# Altium PCB KitchenTimer1.PcbDoc
Units mm, origin at the board's own origin, x right, y up, seen from the top; angles counter-clockwise.
Board outline 100 x 100 mm, 2 copper layers (Top Layer, Bottom Layer); 46 components, 44 nets, 179 pads, 0 vias.
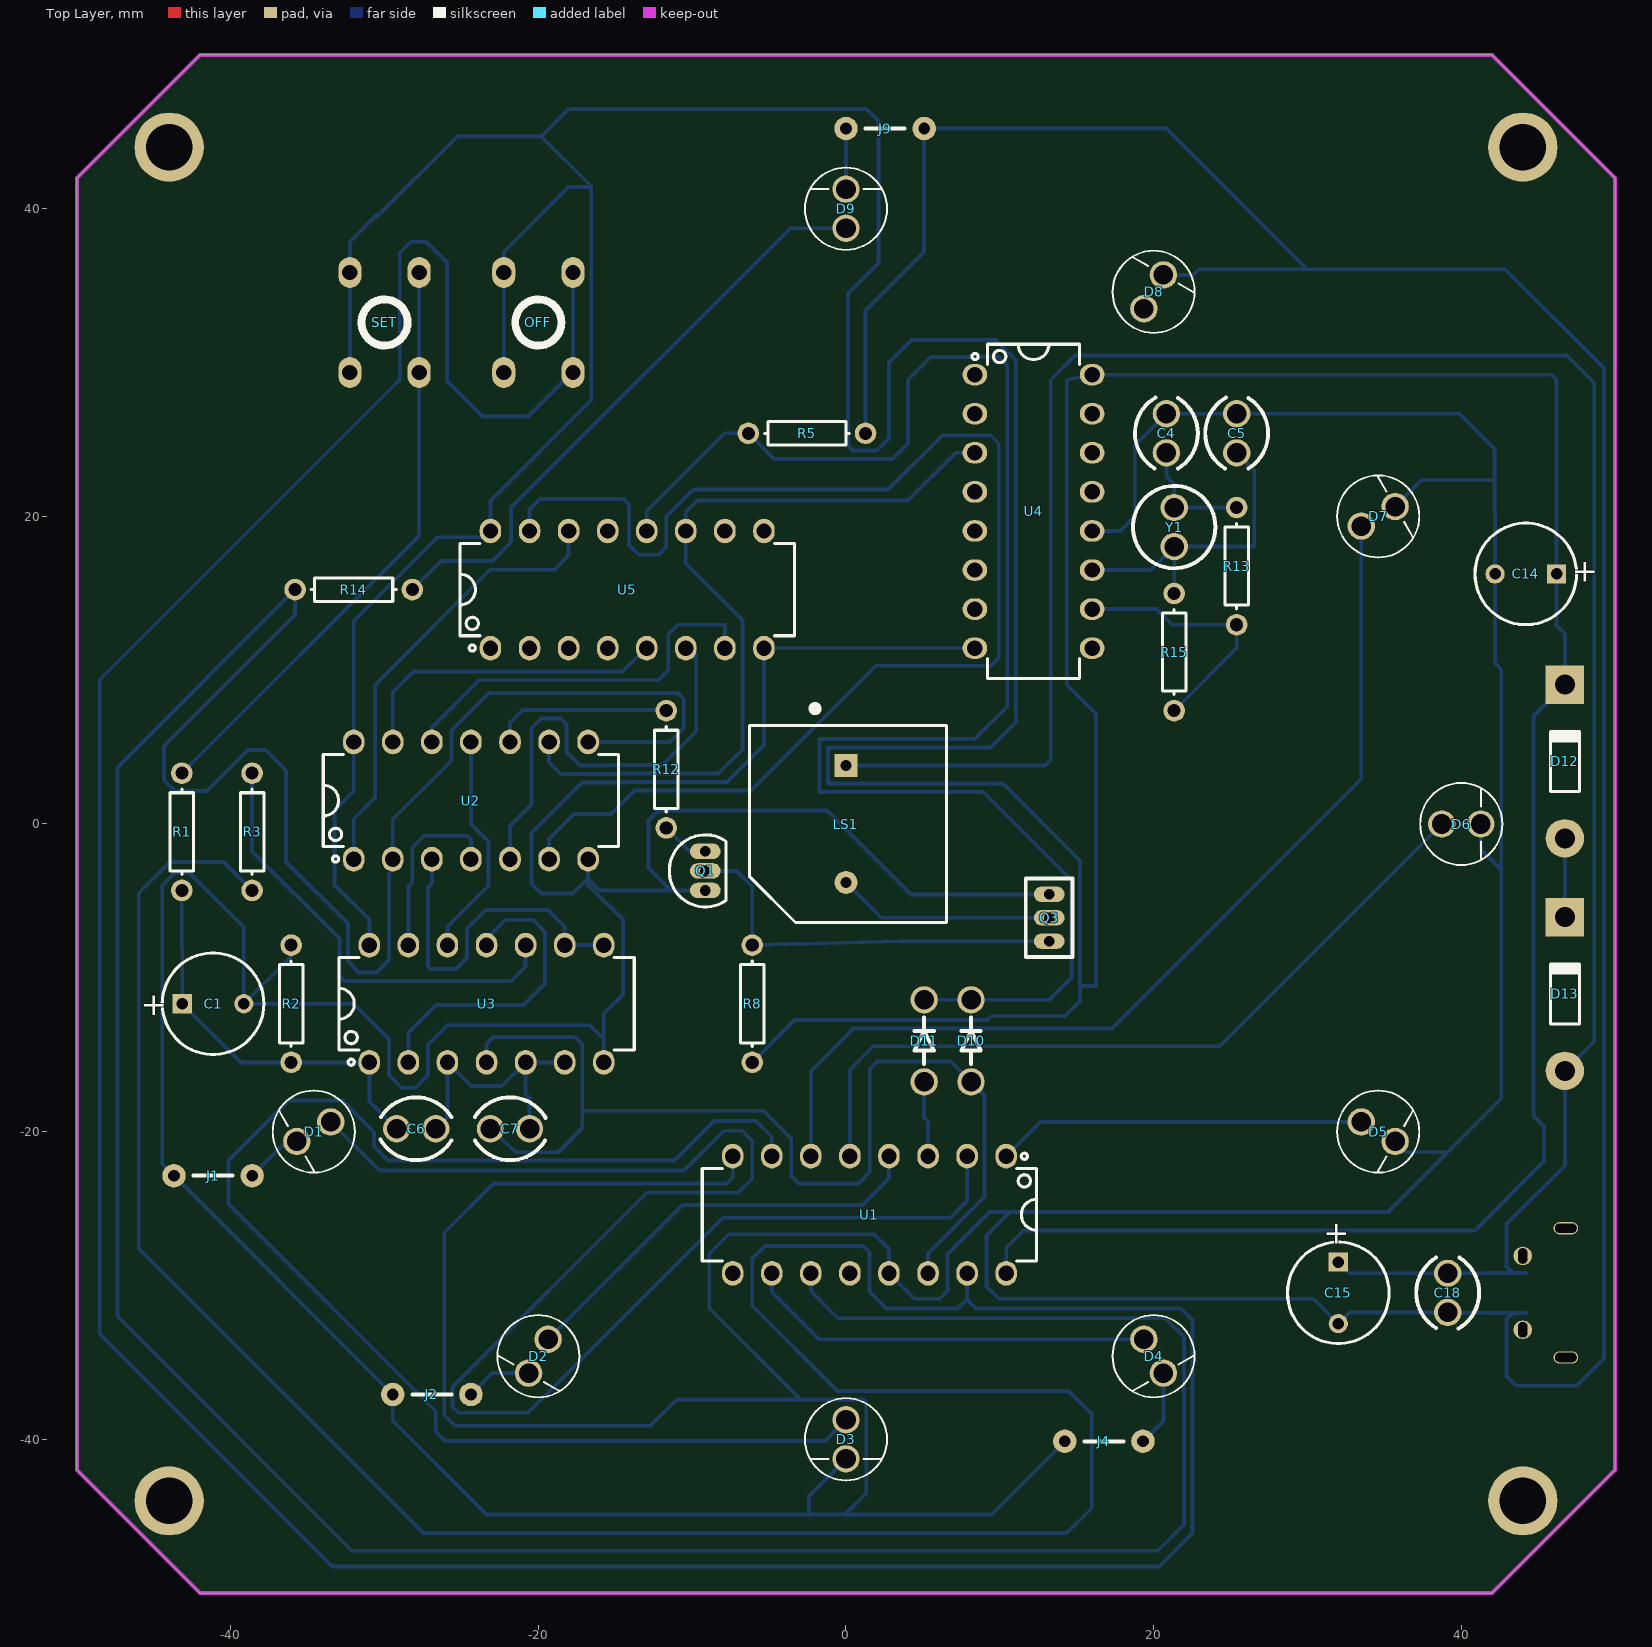
[diagram p0: Top Layer view]
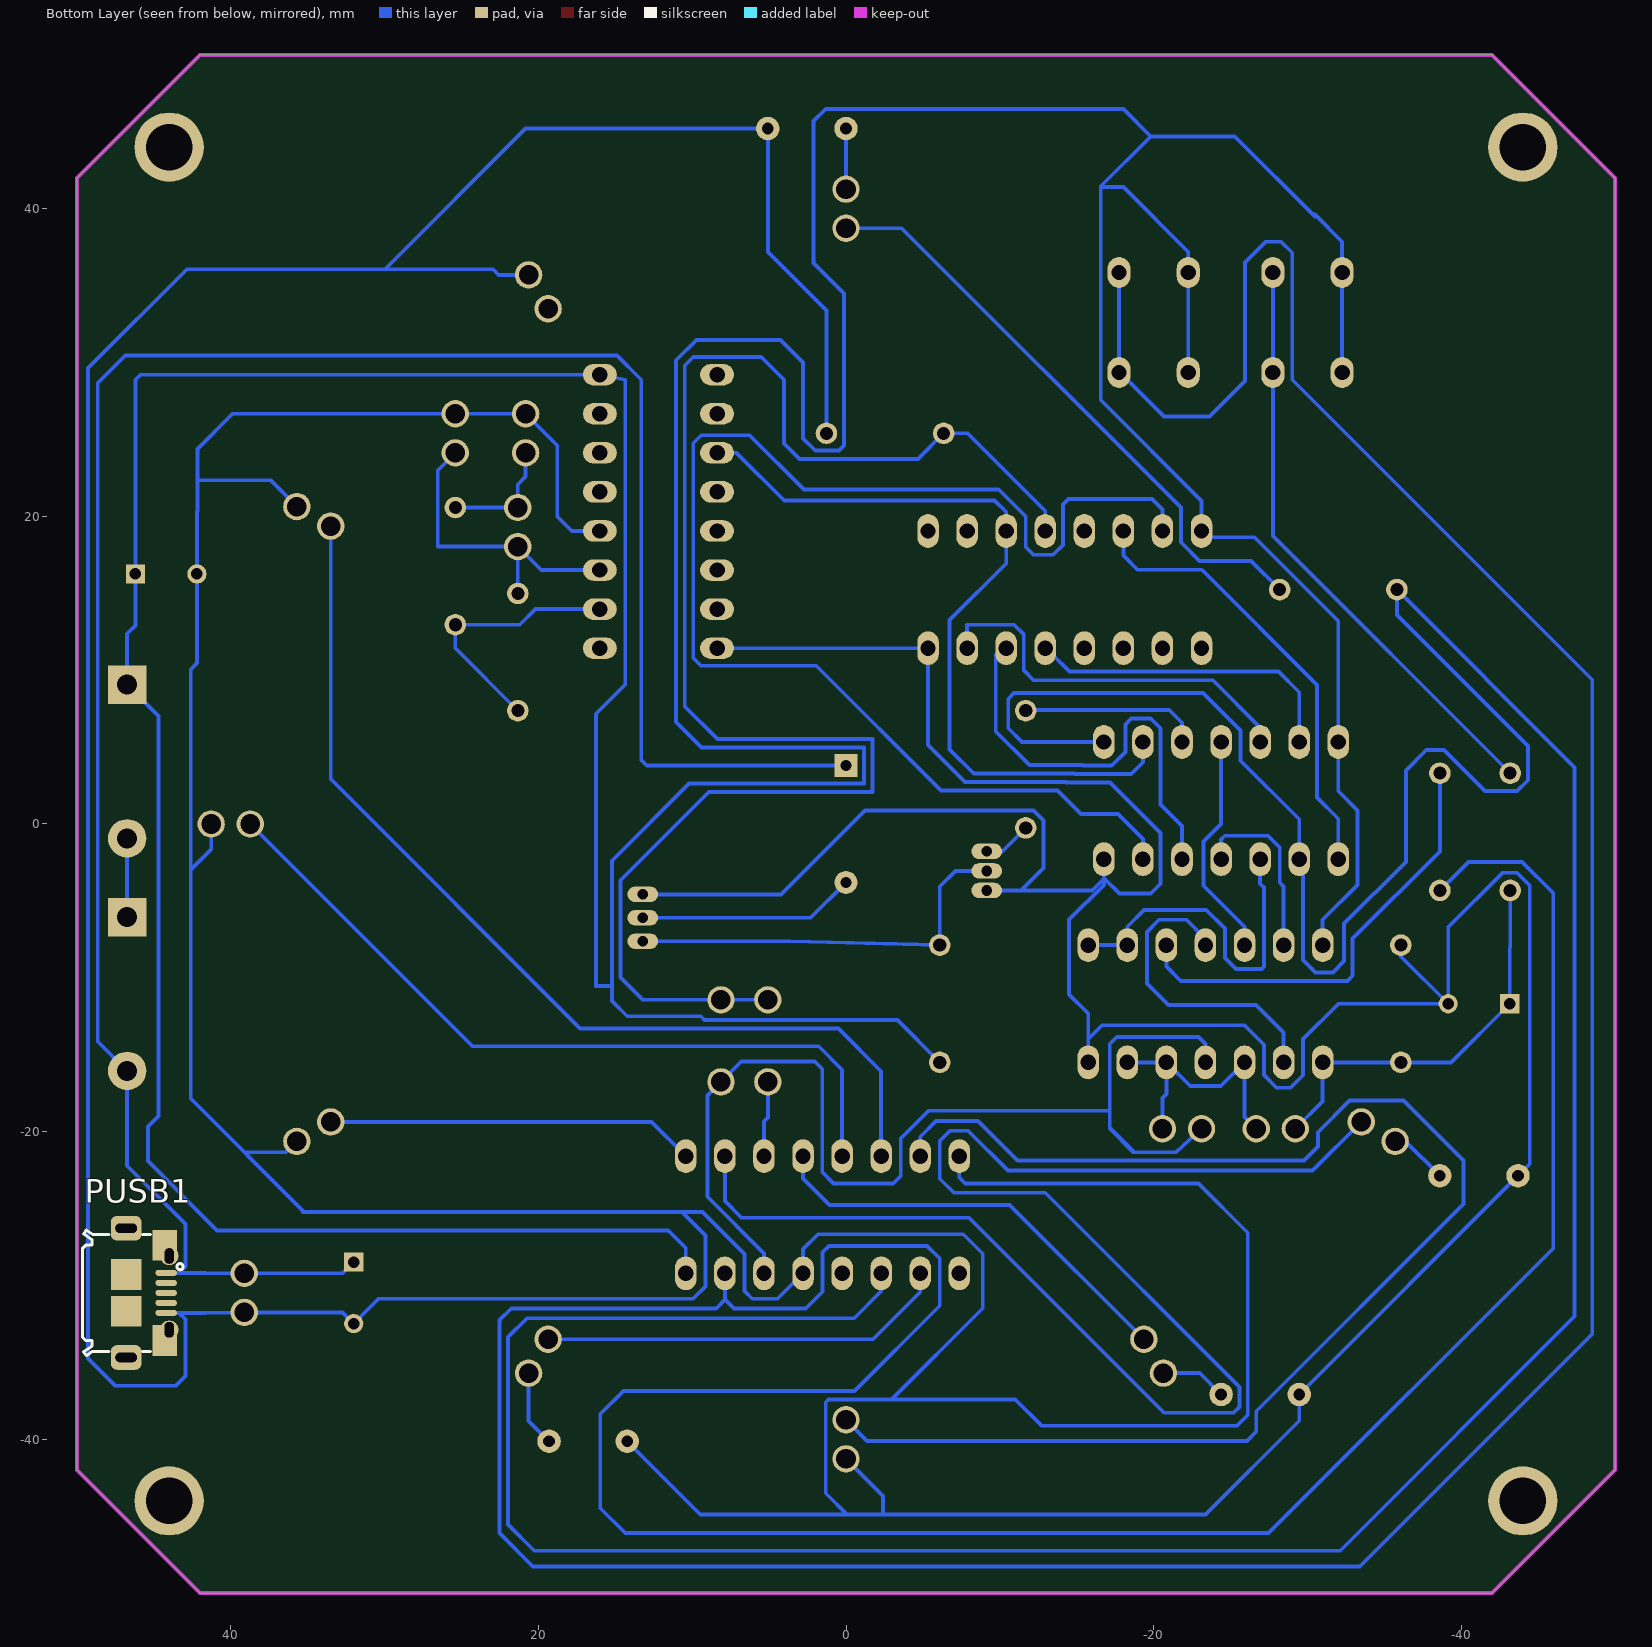
[diagram p1: Bottom Layer view, seen from below]

## Layer stack, top to bottom
Top Layer: signal copper 0.0356
Dielectric: dielectric 0.32, FR-4, Dk 4.8
Bottom Layer: signal copper 0.0356

## Board outline
-50,-42 -50,42 -42,50 42,50 50,42 50,-42 42,-50 -42,-50

## Design rules (kind name [scope] priority, off if disabled: settings)
Clearance [All] p1: gap=0.3
DiffPairsRouting [All] p1 off: maxlimit=0.254 minlimit=0.254 mostfreqgap=0.254 maxuncoupledlength=12.7
FanoutControl Fanout_BGA [IsBGA] p1 off: bgadir=Out bgaviamode=Centered fanoutstyle=Auto fanoutdirection=Alternating viagrid=0.025 // Fanout_BGA (Default Rule)
FanoutControl Fanout_LCC [IsLCC] p2 off: bgadir=Out bgaviamode=Centered fanoutstyle=Auto fanoutdirection=Alternating viagrid=0.025 // Fanout_LCC (Default Rule)
FanoutControl Fanout_SOIC [IsSOIC] p3 off: bgadir=Out bgaviamode=Centered fanoutstyle=Auto fanoutdirection=Alternating viagrid=0.025 // Fanout_SOIC (Default Rule)
FanoutControl Fanout_Small [(CompPinCount < 5)] p4 off: bgadir=Out bgaviamode=Centered fanoutstyle=Auto fanoutdirection=OutThenIn viagrid=0.025 // Fanout_Small (Default Rule)
FanoutControl Fanout_Default [All] p5 off: bgadir=Out bgaviamode=Centered fanoutstyle=Auto fanoutdirection=Alternating viagrid=0.025 // Fanout_Default (Default Rule)
MinimumSolderMaskSliver [All] p1: minsoldermaskwidth=0.001
PolygonConnect [All] p1: connectstyle=Relief reliefconductorwidth=0.254 reliefentries=4 polygonreliefangle="90 Angle"
RoomDefinition 5min_DIP [InComponentClass('5min_DIP')] p1: confinementstyle=ConfineIn formatcopy=TRUE lockcomponents=FALSE outline -283.975,-85.419 -233.175,-85.419 -233.175,-60.019 -283.975,-60.019
RoutingLayers [All] p1: top layer_v5=FALSE bottom layer_v5=TRUE
RoutingPriority [All] p1 off: routingpriority=0
RoutingTopology [All] p1 off: topology=Shortest
RoutingVias [All] p1 off: holewidth=0.711 width=1.27 viastyle="Through Hole" minholewidth=0.711 minwidth=1.27 maxholewidth=0.711 maxwidth=1.27
SilkToSilkClearance [All] p1: silktosilkclearance=0.001
SilkscreenOverComponentPads [IsPad] p1: minsilkscreentomaskgap=0.001
SolderMaskExpansion [All] p1 off: expansion=0.102
TestPointUsage [All] p1: valid=0 allowmultiple=FALSE
Testpoint [All] p1: side=3 testpointundercomponent=TRUE minsize=1.016 maxsize=2.54 preferedsize=1.524 minholesize=0 maxholesize=1.016 preferedholesize=0.813 testpointgrid=0.025 style=297 order=0123456789
Width [All] p1: maxlimit=0.25 minlimit=0.25 preferedwidth=0.25
12 further rules are at their usual default settings.

## Components (designator, comment, footprint, x,y, rotation, side; value= is the part's Value field where it differs from the comment)
C1 "Cap Pol1" A -41.148,-11.684 r0 top
C4 "Cap" CAP100N 20.828,25.4 r90 top
C5 "Cap" CAP100N 25.4,25.4 r90 top
C6 "Cap" CAP100N -27.94,-19.812 r180 top
C7 "Cap" CAP100N -21.844,-19.812 r0 top
C14 "Cap Pol1" A 44.196,16.256 r180 top
C15 "Cap Pol1" A 32.004,-30.48 r270 top
C18 "Cap" CAP100N 39.116,-30.48 r270 top
D1 "GRN" LED3MM -34.6,-20 r210 top locked
D2 "GRN" LED3MM -20,-34.6 r240 top locked
D3 "GRN" LED3MM 0,-40 r270 top locked
D4 "GRN" LED3MM 20,-34.6 r300 top locked
D5 "GRN" LED3MM 34.6,-20 r330 top locked
D6 "GRN" LED3MM 40,0 r0 top locked
D7 "GRN" LED3MM 34.6,20 r30 top locked
D8 "GRN" LED3MM 20,34.6 r60 top locked
D9 "RED" LED3MM 0,40 r90 top locked
D10 "1N4148" D_LN 8.128,-16.764 r90 top
D11 "1N4148" D_LN 5.08,-16.764 r90 top
D12 "1N4001" DO-35 46.736,4.064 r90 top
D13 "1N4001" DO-35 46.736,-11.049 r90 top
J1 "Jumper" JMP -41.148,-22.86 r0 top
J2 "Jumper" JMP -26.924,-37.084 r0 top
J4 "Jumper" JMP 16.764,-40.132 r0 top
J9 "Jumper" JMP 2.54,45.212 r180 top
LS1 "Buzzer" ABSM-1574 0,0 r270 top
OFF "SW-PB" BUTTN -20,32.604 r90 top
PUSB1 "CONN_USB_MICROB_BM" USB_MICRO_AB_BM_SHS 44.196,-30.48 r90 bottom
Q1 "C945" TO-92 -9.144,-3.048 r0 top
Q3 "BD139" BD139 13.208,-6.096 r0 top
R1 "Res1" AXIAL-0.3 -43.18,-0.508 r270 top
R2 "Res1" AXIAL-0.3 -36.068,-11.684 r90 top
R3 "Res1" AXIAL-0.3 -38.608,-0.508 r270 top
R5 "Res1" AXIAL-0.3 -2.54,25.4 r0 top
R8 "Res1" AXIAL-0.3 -6.096,-11.684 r270 top
R12 "Res1" AXIAL-0.3 -11.684,3.556 r270 top
R13 "Res1" AXIAL-0.3 25.4,16.764 r270 top
R14 "Res1" AXIAL-0.3 -32.004,15.24 r180 top
R15 "Res1" AXIAL-0.3 21.336,11.176 r270 top
SET "SW-PB" BUTTN -30,32.604 r270 top
U1 "HEF4017BT" DIP_16 1.524,-25.4 r270 top
U2 "HEF4011BT" DIP_14 -24.384,1.524 r90 top
U3 "HEF4001BT" DIP_14 -23.368,-11.684 r90 top
U4 "HEF4060BT" DIP_16 12.192,20.32 r0 top
U5 "HEF4060BT" DIP_16 -14.224,15.24 r90 top
Y1 "ECS-040-20-4X-DU" XTAL 21.336,19.304 r90 top

## Footprints (in the part's own frame and the unit in brackets; to place one, negate y for a bottom-side part, rotate by r counter-clockwise, add the part's x,y. Pads: shape width x height; smd on the part's side, far side on the other; paste and mask are expansions set on the pad)
A [mm] "Capacitor, Electrolytic, Radial; Body 4 x 5 mm (Dia.xH typ); Pin Spacing 1.5 mm (typ)"
  rect 1.25x1.25 hole 0.75: 1(-2,0)
  round 1.25 hole 0.75: 2(2,0)
  silkscreen extent -3.3,-3.3 3.3,3.3
ABSM-1574 [mm] "Magnetic Transducer Buzzer"
  rect 1.5x1.5 hole 0.7: 1(-3.8,0)
  round 1.5 hole 0.7: 2(3.8,0)
  silkscreen extent -7.73,-6.28 6.4,6.52
AXIAL-0.3 [mm] "Resistor; 2 Leads"
  round 1.4 hole 0.85: 1(-3.81,0) 2(3.81,0)
  silkscreen extent -2.77,-0.76 2.77,0.76
BD139 [mm]
  oval 2x1 hole 0.7: 1(0,0) 2(0,-1.524) 3(0,1.524)
  silkscreen extent -1.52,-2.54 1.52,2.54
BUTTN [mm]
  oval 2x1.5 hole 1: 1(-3.25,2.25) 1(3.25,2.25) 2(-3.25,-2.25) 2(3.25,-2.25)
  silkscreen extent -1.5,-1.5 1.5,1.5
CAP100N [mil]
  round 70 hole 50: 1(50,0) 2(-50,0)
  silkscreen extent -90,-80 91,80
D_LN [mil]
  round 70 hole 50: 1(0,0) 2(210,0)
  silkscreen extent 45,-25 165,25
DIP_14 [mm] "DIP, pitch 2.54mm, 300mil Width"
  oval 1.6x1.4 / inner round 1.4 / far side oval 2.2x1.4 hole 1: 1(-3.81,7.62) 2(-3.81,5.08) 3(-3.81,2.54) 4(-3.81,0) 5(-3.81,-2.54) 6(-3.81,-5.08) 7(-3.81,-7.62) 8(3.81,-7.62) 9(3.81,-5.08) 10(3.81,-2.54) 11(3.81,0) 12(3.81,2.54) 13(3.81,5.08) 14(3.81,7.62)
  silkscreen extent -4,-9.6 3,9.6, body extent -4,-9.53 4,9.52, height 3.81
DIP_16 [mm] "DIP, pitch 2.54mm, 300mil Width"
  oval 1.6x1.4 / inner round 1.4 / far side oval 2.2x1.4 hole 1: 1(-3.81,8.89) 2(-3.81,6.35) 3(-3.81,3.81) 4(-3.81,1.27) 5(-3.81,-1.27) 6(-3.81,-3.81) 7(-3.81,-6.35) 8(-3.81,-8.89) 9(3.81,-8.89) 10(3.81,-6.35) 11(3.81,-3.81) 12(3.81,-1.27) 13(3.81,1.27) 14(3.81,3.81) 15(3.81,6.35) 16(3.81,8.89)
  silkscreen extent -4,-10.87 3,10.87, body extent -3.93,-10 3.94,10, height 5.1
DO-35 [mm] "Diode, Axial; Body 3.8 x 1.9 mm (LxDia. max), Lead Dia. 0.53 mm (max)"
  round 2.5 hole 1.3: 1(-5,0)
  rect 2.5x2.5 hole 1.3: 2(5,0)
  silkscreen extent -1.95,-0.95 2.05,0.95
JMP [mil]
  round 60 hole 30: 1(-100,0) 2(100,0)
  silkscreen extent -50,0 50,0
LED3MM [mil] "Typical INFRARED GaAs LED; 2 Leads"
  round 70 hole 50: 1(-50,0) 2(50,0)
  silkscreen extent -105,-105 105,105
TO-92 [mm] "TO, Flat Index; 3 In-Line, Axial Leads; Body Dia. 4.6mm; Leads 0.41 x 0.39 mm (max)"
  oval 2x1 hole 0.7: 1(0,0) 2(0,1.27) 3(0,-1.27)
  silkscreen extent -2.34,-2.34 1.35,2.34
USB_MICRO_AB_BM_SHS [mm] "CONN, USB Micro AB - Standard (Bottom mount), Shell THD, TE 1981584-1"
  oval 0.4x1.4 smd: 1(1.3,0) 2(0.65,0) 3(0,0) 4(-0.65,0) 5(-1.3,0)
  round 1.2 hole 0.6 slot 1 at 0 deg: SH1(-2.4,-0.2) SH2(2.4,-0.2)
  rect 2x2 smd: SH3(-1.2,2.6) SH4(1.2,2.6)
  rrect50% 1.6x2 / inner oval 0.8x1.6 / far side oval 0.8x1.6 hole 0.6 slot 1.4 at 90 deg: SH5(-4.2,2.6) SH6(4.2,2.6)
  rect 2x1.6 smd: SH7(-3.1,0.1) SH8(3.1,0.1)
  silkscreen extent -4.08,-1.1 4.08,5.43, body extent -4.4,-0.2 4.4,5.4, height 2.78
XTAL [mil]
  round 70 hole 50: 1(50,0) 2(-50,0)
  silkscreen extent -105,-105 105,105

## Part data
C1 C14 C15: "Polarized Capacitor (Radial)"
C4 C5 C6 C7 C18: "Capacitor"
D1 D2 D3 D4 D5 D6 D7 D8 D9: library part LED0, "Typical INFRARED GaAs LED"
D10 D11 D12 D13: library part "Diode 1N4148", "High Conductance Fast Diode"
LS1: "Magnetic Transducer Buzzer"
OFF SET: "Switch"
PUSB1: library part CONN_USB_MICRO_AB_BM_SHS, "CONN, USB, MICRO AB, R/A, SMD, BOTTOM MOUNT"
Q1 Q3: library part NPN, "NPN Bipolar Transistor"
R1 R2 R3 R5 R8 R12 R13 R14 R15: "Resistor"
U1: library part CD4017_DIP16, "Counter, 10 decoded output"
U2: library part NANDx4_CD4011BCM, "GATE, NAND, Quad 2-Input"
U3: library part NORx4_CD74HC02_DIP, "Gate, NOR, Quad 2 Input"
U4 U5: library part CD4060_DIP16, "Counter, 14-Bit Binary, 3~18v, 10mA"
Y1: library part XTAL, "Crystal Oscillator"

## Free pads (board coordinates)
  round 4.5 hole 3: 0(-44,-44) 0(-44,44) 0(44,-44) 0(44,44)

## Nets (pads, with @x,y where several pads share a name; then routed paths per layer and width w, separated by ;. In a path a pad name is that pad's centre, name@x,y a point inside that pad or via, vN(x,y) a via of type N, cw(c..) or ccw(c..) an arc to the next point about the centre after c; other vN are vias at no path point)
5VDC: C15.1 C18.2 D13.1 LS1.1 PUSB1.1 | length 148.6
  Bottom Layer w0.25: LS1.1 12.951,3.8 13.307,4.156 13.307,28.881 14.881,30.456 46.86,30.456 48.641,28.675 48.641,-14.144 D13.1 46.736,-22.221 42.948,-26.008 42.948,-28.761 43.368,-29.18 ; C15.1 32.734,-29.21 C18.2 41.658,-29.18 43.368,-29.18 ; 43.368,-29.18 PUSB1.1 43.368,-29.18
GND: C1.2 C4.1 C5.1 C14.2 C15.2 C18.1 D3.2 D5.2 D6.2 D7.2 D8.2 J1.1 J2.1 J4.1 J9.1 PUSB1.5 Q1.3 Q3.3 R2.2 R5.2 U1.8 U1.13 U2.7 U3.7 U4.8 U4.12 U5.8 | length 718.4
  Bottom Layer w0.25: R2.2 -36.068,-8.604 C1.2 ; U1.8 -7.366,-22.983 -7.75,-23.367 -22.914,-23.367 -26.121,-26.574 -26.121,-38.429 -25.435,-39.115 -12.703,-39.115 -11.001,-37.413 -2.954,-37.413 ; -2.413,-44.831 -2.413,-43.683 D3.2 ; R5.2 1.27,33.377 5.08,37.187 J9.1 20.828,45.212 29.972,36.068 ; U4.8 U5.8 -5.334,5.135 -7.737,2.732 -14.278,2.732 -14.307,2.702 -17.173,2.702 -20.45,-0.574 -20.45,-3.885 -19.815,-4.52 -17.78,-4.52 -16.791,-3.532 ; Q3.3 4.215,-4.572 -1.228,0.871 -12.195,0.871 -12.83,0.236 -12.83,-2.869 -11.381,-4.318 ; J4.1 9.475,-44.881 -0.054,-44.881 ; U4.12 17.827,19.05 18.768,19.991 18.768,24.61 C4.1 C5.1 39.878,26.67 42.164,24.384 42.164,20.328 42.196,20.296 C14.2 42.196,10.456 42.593,10.06 42.593,-17.859 35.231,-25.221 10.665,-25.221 ; D8.2 22.578,35.7 22.946,36.068 29.972,36.068 ; 35.306,-25.221 10.665,-25.221 ; D5.2 36.401,-21.336 39.116,-21.336 ; D7.2 37.417,22.352 42.164,22.352 ; D6.2 41.27,-1.646 42.545,-2.921 ; PUSB1.5 43.368,-31.78 ; C1.2 -32.006,-11.684 -29.718,-13.972 -29.718,-16.334 -28.907,-17.145 -27.995,-17.145 -27.178,-16.328 -27.178,-14.347 -25.912,-13.081 -16.639,-13.081 -15.748,-13.972 ; C1.2 -39.148,-6.701 -42.675,-3.174 -43.64,-3.174 -44.453,-3.987 -44.453,-22.095 J1.1 J2.1 -29.464,-38.795 -23.378,-44.881 -8.459,-44.881 ; -16.791,-3.532 -16.764,-3.504 ; -16.791,-3.532 U2.7 ; -16.791,-3.532 -16.764,-3.559 ; -16.764,-3.559 -16.005,-4.318 -11.381,-4.318 ; -16.764,-3.559 -16.764,-3.504 ; -16.764,-3.559 -16.764,-3.961 -14.506,-6.219 -14.506,-11.073 -15.748,-12.315 -15.748,-13.972 ; -16.764,-3.504 U2.7 ; -16.764,-3.504 U2.7 ; -15.748,-13.972 U3.7 -15.748,-13.972 ; -11.381,-4.318 Q1.3 -11.381,-4.318 ; -8.459,-44.881 -6.875,-44.881 ; -8.459,-44.881 -6.875,-44.881 ; -6.875,-44.881 -0.054,-44.881 ; -6.875,-44.881 -0.054,-44.881 ; -2.954,-37.413 -8.89,-31.477 -8.89,-27.94 -7.62,-26.67 1.83,-26.67 2.794,-27.634 U1.13 4.445,-30.861 6.094,-30.861 6.601,-30.354 6.601,-27.943 9.323,-25.221 10.665,-25.221 ; -2.954,-37.413 1.14,-37.413 ; -2.954,-37.413 1.14,-37.413 ; -0.054,-44.881 1.318,-43.509 1.318,-37.591 1.14,-37.413 ; 10.665,-25.221 9.144,-26.742 9.144,-30.059 9.946,-30.861 30.385,-30.861 C15.2 32.734,-31.75 C18.1 41.658,-31.78 43.368,-31.78 ; 29.972,36.068 42.848,36.068 49.276,29.64 49.276,-34.743 47.495,-36.524 43.583,-36.524 42.948,-35.889 42.948,-32.199 43.368,-31.78
NetC1_1: C1.1 C6.1 R1.2 R2.1 U3.1 | length 26.2
  Bottom Layer w0.25: R1.2 -43.18,-7.993 -43.148,-8.025 C1.1 -39.338,-15.494 R2.1 U3.1 -30.988,-18.034 C6.1
NetC4_2: C4.2 R13.1 Y1.1 | length 7.8
  Bottom Layer w0.25: C4.2 20.828,22.582 21.336,22.074 Y1.1 R13.1
NetC5_2: C5.2 R15.1 U4.11 Y1.2 | length 20.8
  Bottom Layer w0.25: U4.11 19.812,16.51 Y1.2 ; R15.1 21.336,16.486 Y1.2 ; C5.2 26.54,22.99 26.54,18.035 26.539,18.034 Y1.2
NetC6_2: C6.2 C7.1 U3.3 U3.5 U3.6 | length 18
  Bottom Layer w0.25: C6.2 -25.908,-19.05 U3.3 -24.36,-17.042 -22.376,-17.042 U3.5 ; C7.1 -20.574,-17.804 -20.828,-17.55 U3.5 ; U3.6 U3.5
NetC7_2: C7.2 D10.1 U1.14 U3.4 | length 77.3
  Bottom Layer w0.25: U3.4 -23.368,-14.299 -22.912,-13.843 -17.604,-13.843 -17.148,-14.299 -17.148,-18.642 ; C7.2 -21.463,-21.336 ; U1.14 5.334,-27.91 9.014,-24.23 9.014,-17.65 D10.1 6.806,-15.442 2.029,-15.442 1.546,-15.925 1.546,-22.63 0.809,-23.368 -3.075,-23.368 -3.556,-22.887 -3.556,-20.447 -5.361,-18.642 -17.148,-18.642 ; -21.463,-21.336 -18.749,-21.336 -17.148,-19.735 -17.148,-18.642 ; -21.463,-21.336 -18.669,-21.336 -17.148,-19.815 -17.148,-18.642
NetD1_1: D1.1 U1.2 | length 101.1
  Bottom Layer w0.25: D1.1 -30.337,-22.529 -10.531,-22.529 -7.941,-19.939 -6.758,-19.939 -6.096,-20.601 -6.096,-23.059 -7.013,-23.976 -12.957,-23.976 -25.571,-36.59 -25.571,-37.893 -25.187,-38.277 -20.679,-38.277 -8.004,-25.602 6.782,-25.602 7.874,-24.51 U1.2
NetD1_2: D1.2 J1.2 | length 3.8
  Bottom Layer w0.25: J1.2 -36.383,-20.635 D1.2
NetD2_1: D2.1 U1.4 | length 27.9
  Bottom Layer w0.25: D2.1 -10.629,-24.764 1.067,-24.764 2.794,-23.037 U1.4
NetD2_2: D2.2 J2.2 | length 4.3
  Bottom Layer w0.25: J2.2 -23,-35.7 D2.2
NetD3_1: D3.1 U1.7 | length 92.5
  Bottom Layer w0.25: U1.7 -4.826,-20.331 -5.853,-19.304 -8.579,-19.304 -11.161,-21.886 -29.773,-21.886 -30.682,-20.977 -30.682,-20.044 -32.744,-17.982 -36.249,-17.982 -40.135,-21.868 -40.135,-24.713 -26.671,-38.177 -26.671,-39.502 -26.068,-40.105 -1.375,-40.105 D3.1
NetD4_1: D4.1 U1.10 | length 26.7
  Bottom Layer w0.25: U1.10 -4.826,-30.431 -1.757,-33.5 D4.1
NetD4_2: D4.2 J4.2 | length 5
  Bottom Layer w0.25: J4.2 20.635,-38.801 D4.2
NetD5_1: D5.1 U1.1 | length 24
  Bottom Layer w0.25: U1.1 12.639,-19.365 D5.1
NetD6_1: D6.1 U1.5 | length 50.7
  Bottom Layer w0.25: U1.5 0.254,-15.972 1.775,-14.451 24.279,-14.451 D6.1
NetD7_1: D7.1 U1.6 | length 65.6
  Bottom Layer w0.25: U1.6 -2.286,-16.074 0.494,-13.294 17.283,-13.294 33.5,2.923 D7.1
NetD9_1: D9.1 R14.1 | length 39.2
  Bottom Layer w0.25: R14.1 -26.339,17.095 -22.99,17.095 -21.771,18.315 -21.771,20.575 -3.616,38.73 D9.1
NetD9_2: D9.2 J9.2 | length 3.9
  Bottom Layer w0.25: D9.2 J9.2
NetD10_2: D10.2 D11.2 R5.1 U5.12 | length 106.9
  Bottom Layer w0.25: U5.12 -12.954,20.35 -7.904,25.4 R5.1 -4.675,23.725 3.02,23.725 4.036,24.741 4.036,28.881 5.509,30.354 9.928,30.354 10.487,29.795 10.487,7.647 8.366,5.525 -1.725,5.525 -1.725,2.075 8.921,2.075 14.653,-3.656 14.653,-9.982 13.205,-11.43 D10.2 D11.2
NetD11_1: D11.1 U1.3 | length 4.9
  Bottom Layer w0.25: D11.1 5.08,-19.074 5.334,-19.328 U1.3
NetD12_1: D12.1 D13.2 | length 5.1
  Bottom Layer w0.25: D13.2 46.736,-3.504 D12.1
NetLS1_2: LS1.2 Q3.1 | length 14.2
  Bottom Layer w0.25: LS1.2 2.296,-6.096 Q3.1
NetOFF_2: OFF.2 R3.2 U1.15 | length 373.3
  Bottom Layer w0.25: R3.2 -40.463,-2.463 -43.945,-2.463 -45.974,-4.492 -45.974,-27.586 -27.459,-46.101 14.355,-46.101 15.974,-44.482 15.974,-38.353 14.475,-36.854 -0.562,-36.854 -6.096,-31.32 -6.096,-28.253 -5.275,-27.432 1.116,-27.432 1.524,-27.84 1.524,-30.406 2.614,-31.496 7.286,-31.496 7.874,-30.908 ; OFF.2@-17.75,29.354 OFF.2@-17.75,29.422 ; -17.75,32.589 -17.75,35.854 OFF.2@-17.75,29.422 ; U1.15 7.874,-30.908 ; OFF.2@-17.75,29.422 -20.679,26.493 -23.625,26.493 -25.936,28.805 -25.936,36.501 -27.283,37.847 -28.299,37.847 -29.01,37.136 -29.01,28.881 -48.514,9.377 -48.514,-33.149 -33.403,-48.26 20.367,-48.26 22.527,-46.1 22.527,-32.257 21.765,-31.495 8.433,-31.495 7.874,-30.908
NetPUSB1_SH1: PUSB1.SH1 PUSB1.SH7
NetPUSB1_SH2: PUSB1.SH2 PUSB1.SH8
NetQ1_1: Q1.1 Q3.2 R8.1 | length 26.6
  Bottom Layer w0.25: Q1.1 -7.115,-3.048 -6.096,-4.067 R8.1 3.68,-7.62 Q3.2
NetQ1_2: Q1.2 R12.2 | length 3.2
  Bottom Layer w0.25: R12.2 -10.16,-1.778 Q1.2
NetR1_1: R1.1 SET.1 | length 38.9
  Bottom Layer w0.25: R1.1 -27.75,18.732 -27.75,29.354 SET.1@-27.75,35.854
NetR3_1: R3.1 U3.10 | length 29.5
  Bottom Layer w0.25: R3.1 -38.608,-1.778 -32.935,-7.451 -32.935,-9.866 -32.599,-10.202 -21.766,-10.202 -20.828,-9.264 U3.10
NetR12_1: R12.1 U2.10 | length 11.8
  Bottom Layer w0.25: U2.10 -21.844,6.586 -21.012,7.418 -11.736,7.418 R12.1
NetR13_2: R13.2 R15.2 U4.10 | length 17.1
  Bottom Layer w0.25: U4.10 20.19,13.97 21.206,12.954 R13.2 25.4,11.43 R15.2
NetR14_2: R14.2 U1.11 U2.2 U2.8 | length 251.8
  Bottom Layer w0.25: U2.8 -11.433,5.335 -10.544,6.224 -10.544,8.129 -10.925,8.51 -23.219,8.51 -25.657,6.072 -25.657,4.116 -29.464,0.309 U2.2 -29.464,-2.971 -29.718,-3.225 -29.718,-8.848 -30.522,-9.652 -31.65,-9.652 -32.385,-8.917 -32.385,-6.477 -36.401,-2.461 -36.401,3.481 -37.722,4.802 -38.865,4.802 -41.532,2.135 -43.615,2.135 -44.326,2.846 -44.326,5.081 -35.814,13.593 R14.2 -47.371,3.683 -47.371,-32.001 -32.128,-47.244 20.265,-47.244 21.968,-45.541 21.968,-33.349 20.75,-32.131 -0.535,-32.131 -2.286,-30.38 U1.11
NetU2_1: U2.1 U5.14 | length 29.6
  Bottom Layer w0.25: U2.1 -32.004,0.337 -30.61,1.731 -30.61,9.048 -23.132,16.526 -18.959,16.526 -18.034,17.451 U5.14
NetU2_3: U2.3 U3.8 U3.9 | length 22.9
  Bottom Layer w0.25: U2.3 -26.924,-3.885 -27.178,-4.139 -27.178,-9.273 -27.029,-9.422 -25.352,-9.422 -24.638,-8.708 -24.638,-6.803 -23.423,-5.588 -19.379,-5.588 -18.288,-6.679 U3.9 U3.8
NetU2_4: U2.4 U3.13 | length 12
  Bottom Layer w0.25: U3.13 -28.448,-4.06 -28.197,-3.809 -28.197,-1.523 -27.435,-0.761 -24.62,-0.761 -24.384,-0.996 U2.4
NetU2_5: U2.5 U5.6 | length 29.4
  Bottom Layer w0.25: U2.5 -21.844,-0.126 -20.45,1.268 -20.45,6.224 -19.815,6.859 -18.545,6.859 -18.164,6.478 -18.164,4.691 -17.275,3.802 -15.389,3.802 -15.36,3.832 -11.92,3.832 -9.731,6.021 -9.731,11.025 -10.414,11.025 U5.6
NetU2_6: U2.6 U5.15 | length 89.2
  Bottom Layer w0.25: U5.15 -20.574,20.448 -19.888,21.134 -14.456,21.134 -14.1,20.778 -14.1,18.137 -13.465,17.502 -12.195,17.502 -11.687,18.01 -11.687,19.991 -9.934,21.744 2.74,21.744 6.271,25.274 9.408,25.274 9.928,24.754 9.928,10.784 9.433,10.288 1.938,10.288 -6.168,2.182 -13.739,2.182 -15.266,0.655 -17.685,0.655 -19.304,-0.964 U2.6
NetU2_9: U2.9 U4.3 U5.11 | length 52.2
  Bottom Layer w0.25: U2.9 -19.304,4.011 -18.545,3.252 -14.868,3.252 -14.839,3.282 -8.305,3.282 -6.734,4.853 -6.734,13.26 -10.414,16.94 U5.11 -10.414,20.273 -9.655,21.032 4.01,21.032 7.108,24.13 U4.3
NetU2_11: U2.11 U3.12 | length 14.8
  Bottom Layer w0.25: U3.12 -25.908,-6.679 -23.244,-4.015 -23.244,-1.139 -24.384,0.001 U2.11
NetU2_12: U2.12 U5.7 | length 25.7
  Bottom Layer w0.25: U2.12 -26.924,6.275 -23.851,9.348 -12.195,9.348 -11.56,9.983 -11.56,12.32 -10.925,12.955 -7.874,12.955 U5.7
NetU2_13: U2.13 U5.5 | length 21.2
  Bottom Layer w0.25: U2.13 -29.464,8.561 -28.12,9.905 -14.532,9.905 -13.412,11.025 -12.954,11.025 U5.5
NetU3_2: U3.2 U3.11 | length 20.6
  Bottom Layer w0.25: U3.2 -28.448,-13.559 -26.648,-11.759 -20.958,-11.759 -19.558,-10.359 -19.558,-7.012 -20.347,-6.223 -22.125,-6.223 -23.368,-7.466 U3.11
VCC: C14.1 D12.2 OFF.1 R8.2 SET.2 U1.16 U2.14 U3.14 U4.16 U5.16 | length 419.8
  Bottom Layer w0.25: SET.2@-32.25,29.354 -32.25,35.854 -32.25,37.854 -30.48,39.624 ; U3.14 -30.988,-6.225 -33.252,-3.961 -33.252,0.887 -32.004,2.135 U2.14 -32.004,13.187 -26.546,18.645 -23.114,18.645 U5.16 -23.114,21.003 -16.564,27.554 -16.564,41.456 -19.812,44.704 ; -30.48,39.497 -25.273,44.704 -19.812,44.704 ; OFF.1@-22.25,29.354 -22.25,35.854 -22.25,37.186 -18.034,41.402 -16.637,41.402 ; R8.2 -3.346,-12.744 9.197,-12.744 9.446,-12.496 14.221,-12.496 15.212,-11.505 ; U1.16 10.414,-27.555 11.553,-26.416 40.89,-26.416 45.387,-21.919 45.387,-19.658 44.704,-18.976 44.704,7.032 D12.2 46.736,12.371 46.196,12.911 C14.1 46.196,28.881 45.867,29.21 U4.16 14.348,28.881 14.348,9.069 16.253,7.164 16.253,-10.54 15.212,-10.54 ; -19.812,44.704 -18.033,46.483 1.318,46.483 2.105,45.696 2.105,36.476 0.124,34.494 0.124,24.614 0.463,24.275 1.995,24.275 2.791,25.071 2.791,29.999 4.264,31.472 9.725,31.472 11.046,30.151 11.046,6.626 9.395,4.975 -1.175,4.975 -1.175,2.625 10.2,2.625 15.212,-2.386 15.212,-10.54 ; 15.212,-11.505 15.212,-10.54 ; 15.212,-11.505 15.212,-10.54
pads on no net: D8.1 PUSB1.2 PUSB1.3 PUSB1.4 PUSB1.SH3 PUSB1.SH4 PUSB1.SH5 PUSB1.SH6 U1.9 U1.12 U4.1 U4.2 U4.4 U4.5 U4.6 U4.7 U4.9 U4.13 U4.14 U4.15 U5.1 U5.2 U5.3 U5.4 U5.9 U5.10 U5.13

## Keep-outs
Keep-Out Layer:
  the board outline again, w0.254

## Text inside footprints (layer, text, board x,y; h text height)
C1: Top Overlay "+" at -45.847,-12.446 h1.5
C14: Top Overlay "+" at 48.895,17.018 h1.5 r180
C15: Top Overlay "+" at 31.242,-25.781 h1.5 r270
PUSB1: Mechanical 1 "PCB EDGE" at 48.596,-33.18 h0.8 r270